# Altium PCB ArduinoMegaSheild.pcbdoc
Units mil, origin at the board's own origin, x right, y up, seen from the top; angles counter-clockwise.
Board outline 4000 x 2100 mil, 2 copper layers (Top Layer, Bottom Layer); 9 components, 60 nets, 114 pads, 0 vias.
Unrouted connection lines stored in the file: 28.
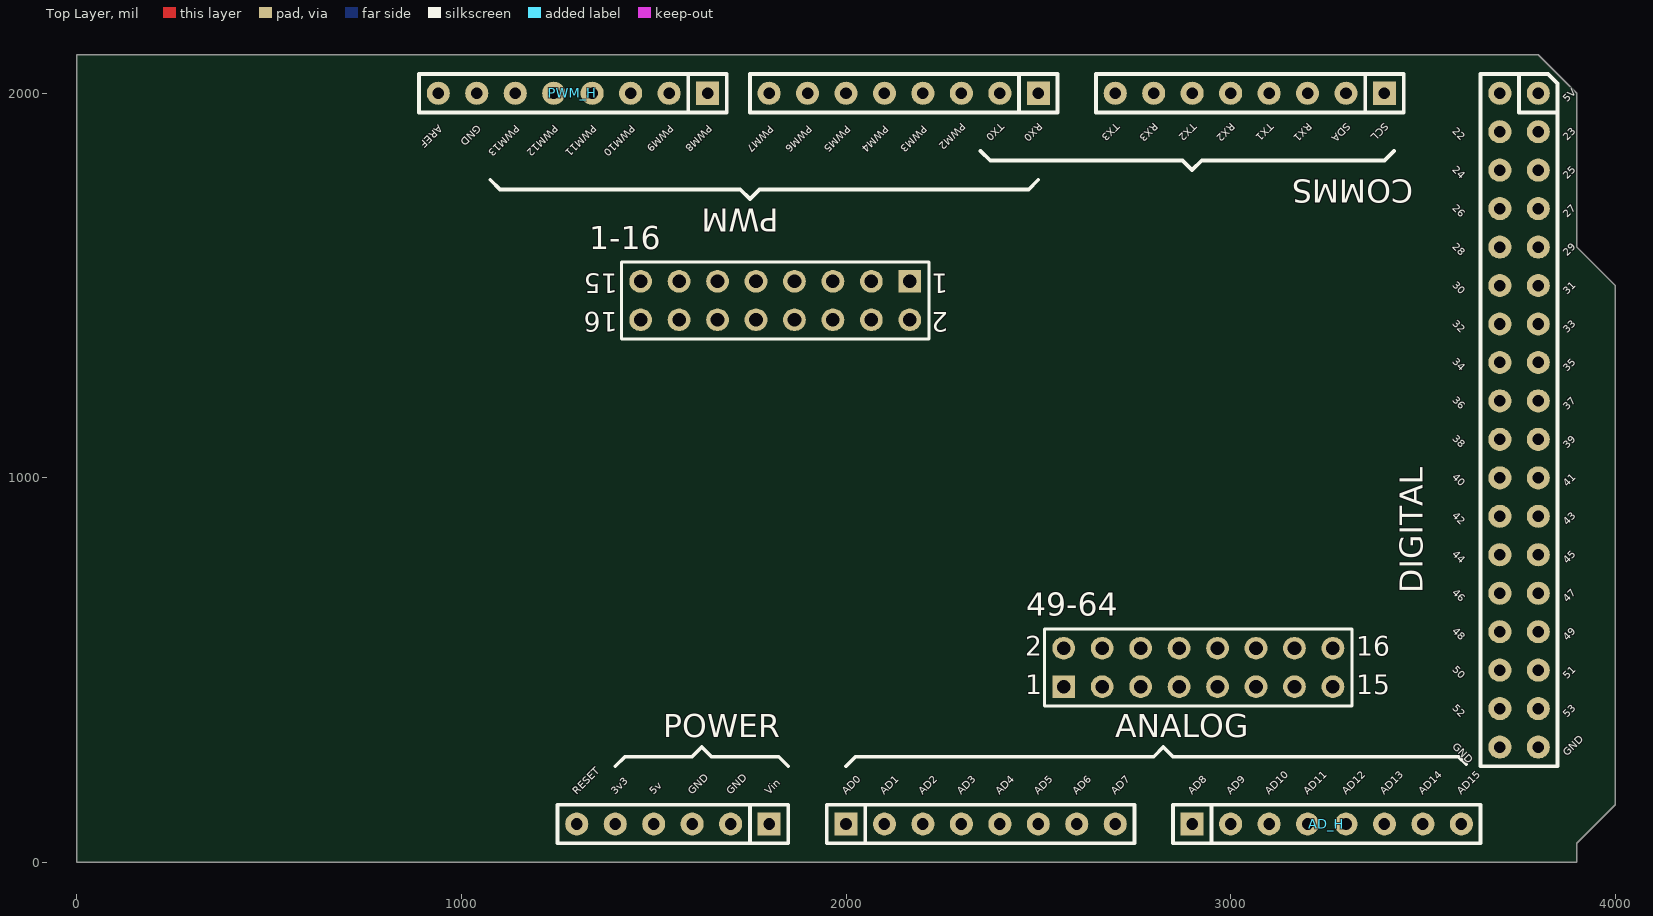
[diagram p0: Top Layer view]
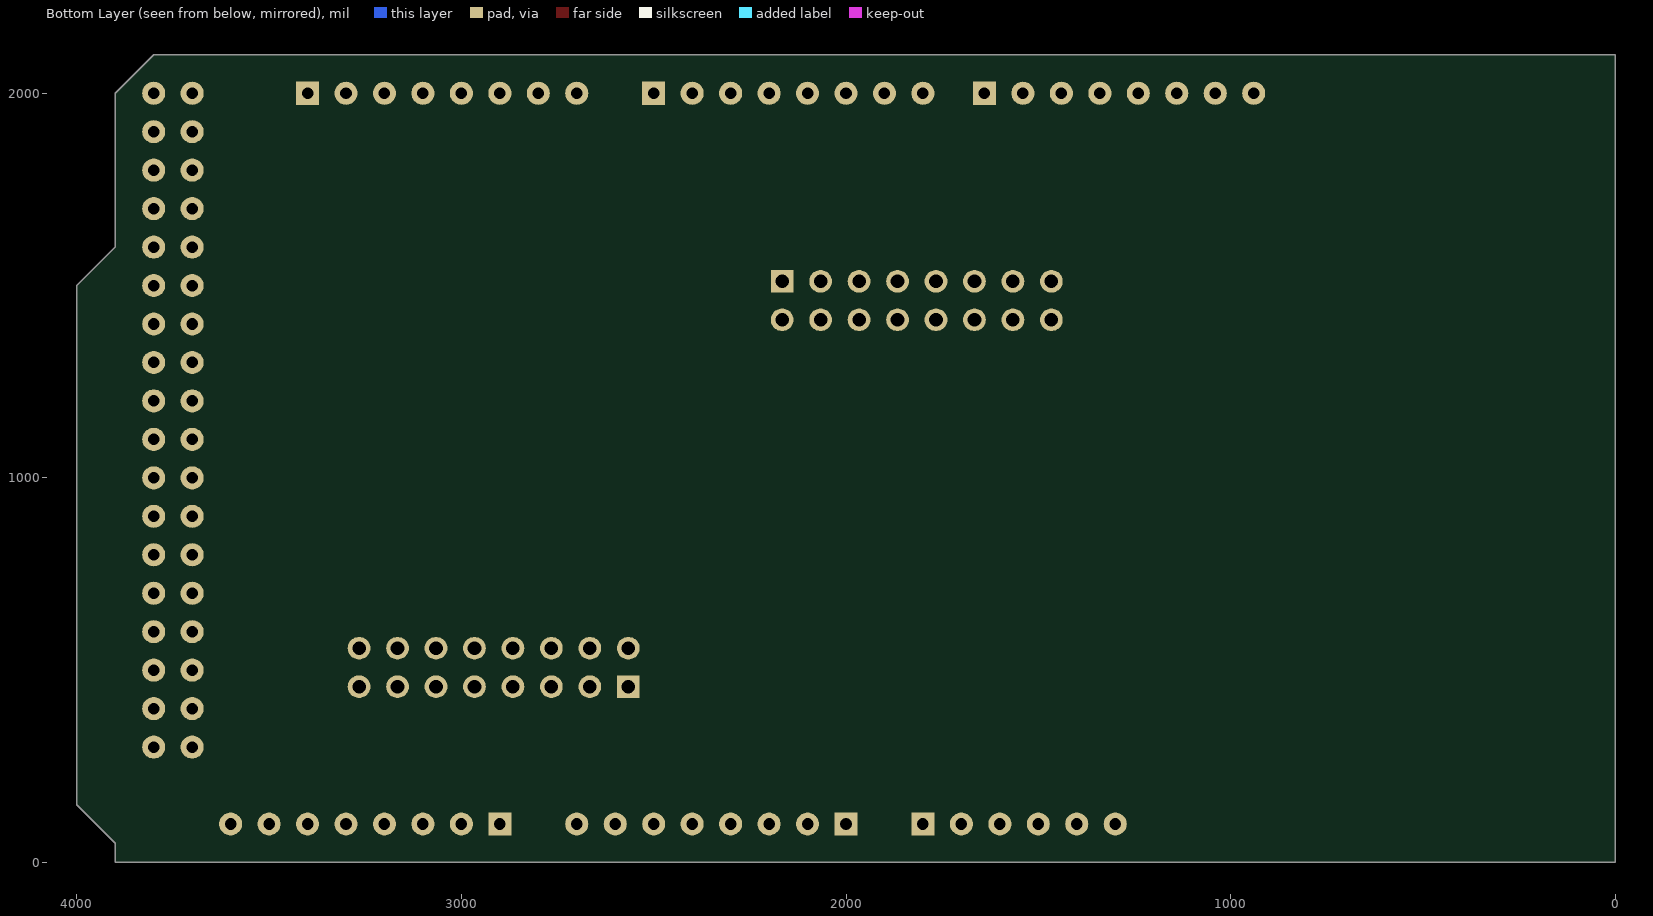
[diagram p1: Bottom Layer view, seen from below]

## Layer stack, top to bottom
Top Solder: solder mask 0.4, Solder Resist, Dk 3.5
Top Layer: signal copper 1.4
Dielectric1: dielectric 12.6, FR-4, Dk 4.8
Bottom Layer: signal copper 1.4
Bottom Solder: solder mask 0.4, Solder Resist, Dk 3.5

## Board outline
0,0 0,2100 3800,2100 3900,2000 3900,1600 4000,1500 4000,150 3900,50 3900,0

## Design rules (kind name [scope] priority, off if disabled: settings)
Clearance [All] p1: gap=10
PolygonConnect [All] p1: connectstyle=Relief reliefconductorwidth=10 reliefentries=4 polygonreliefangle="90 Angle" airgapwidth=10
RoomDefinition AdruinoMegaSheild [InComponentClass('AdruinoMegaSheild')] p1: confinementstyle=ConfineOut formatcopy=TRUE lockcomponents=FALSE outline 4200,900 4750,900 4750,1080 4200,1080
RoutingVias [All] p1: holewidth=28 width=50 viastyle="Through Hole" minholewidth=28 minwidth=50 maxholewidth=28 maxwidth=50
SilkToSolderMaskClearance SilkscreenOverComponentPads [IsPad] p1: minsilkscreentomaskgap=10 clearancetoexposedcopper=TRUE
SolderMaskExpansion [All] p1: expansion=4
Width [All] p1: maxlimit=39.37 minlimit=19.68 preferedwidth=19.68
29 further rules are at their usual default settings.

## Components (designator, comment, footprint, x,y, rotation, side; value= is the part's Value field where it differs from the comment)
1-16 "Header 8X2" HDR2X8 2166,1511 r180 top
49-64 "Header 8X2" HDR2X8 2566,457 r0 top
AD_H "AD_H" "Header 8x1 8.5mm" 2900,100 r0 top locked
ANALOG "AD_L" "Header 8x1 8.5mm" 2000,100 r0 top locked
COMMS "Communication" "Header 8x1 8.5mm" 3400,2000 r180 top
DIGITAL "IO_36" "HEADER 36X 8MM" 3800,2000 r270 top locked
POWER "POWER" "Header 6x1 8.5mm" 1800,100 r180 top locked
PWM "PWM_L" "Header 8x1 8.5mm" 2500,2000 r180 top locked
PWM_H "PWM_H" "Header 8x1 8.5mm" 1640,2000 r180 top locked

## Footprints (in the part's own frame and the unit in brackets; to place one, negate y for a bottom-side part, rotate by r counter-clockwise, add the part's x,y. Pads: shape width x height; smd on the part's side, far side on the other; paste and mask are expansions set on the pad)
HDR2X8 [mm] "Connector; Header; 8x2 Position"
  rect 1.5x1.5 hole 0.9: 1(0,0)
  round 1.5 hole 0.9: 2(0,2.54) 3(2.54,0) 4(2.54,2.54) 5(5.08,0) 6(5.08,2.54) 7(7.62,0) 8(7.62,2.54) 9(10.16,0) 10(10.16,2.54) 11(12.7,0) 12(12.7,2.54) 13(15.24,0) 14(15.24,2.54) 15(17.78,0) 16(17.78,2.54)
  silkscreen extent -1.27,-1.27 19.05,3.81
"Header 6x1 8.5mm" [mil] "Stackable 6 pin header"
  rect 60x60 hole 30: 1(0,0)
  round 60 hole 30: 2(100,0) 3(200,0) 4(300,0) 5(400,0) 6(500,0)
  silkscreen extent -50,-50 550,50, body extent -50,-50 550,50, height 335
"Header 8x1 8.5mm" [mil] "Stackable 8 pin header"
  rect 60x60 hole 30: 1(0,0)
  round 60 hole 30: 2(100,0) 3(200,0) 4(300,0) 5(400,0) 6(500,0) 7(600,0) 8(700,0)
  silkscreen extent -50,-50 750,50, body extent -50,-50 750,50, height 335
"HEADER 36X 8MM" [mil] "Stackable 10 pin header"
  round 60 hole 30: 1(0,0) 2(0,-100) 3(100,0) 4(100,-100) 5(200,0) 6(200,-100) 7(300,0) 8(300,-100) 9(400,0) 10(400,-100) 11(500,0) 12(500,-100) 13(600,0) 14(600,-100) 15(700,0) 16(700,-100) 17(800,0) 18(800,-100) 19(900,-100) 20(900,0) 21(1000,0) 22(1000,-100) 23(1100,0) 24(1100,-100) 25(1200,0) 26(1200,-100) 27(1300,0) 28(1300,-100) 29(1400,0) 30(1400,-100) 31(1500,0) 32(1500,-100) 33(1600,0) 34(1600,-100) 35(1700,0) 36(1700,-100)
  silkscreen extent -50,-150 1750,50, body extent -50,-150 1750,50, height 335

## Part data
1-16 49-64: "Header, 8-Pin, Dual row"

## Nets (pads, with @x,y where several pads share a name; then routed paths per layer and width w, separated by ;. In a path a pad name is that pad's centre, name@x,y a point inside that pad or via, vN(x,y) a via of type N, cw(c..) or ccw(c..) an arc to the next point about the centre after c; other vN are vias at no path point)
AD4: 49-64.1 ANALOG.5
AD5: 49-64.2 ANALOG.6
AD6: 49-64.3 ANALOG.7
AD7: 49-64.4 ANALOG.8
AD8: 49-64.5 AD_H.1
AD9: 49-64.6 AD_H.2
AD10: 49-64.7 AD_H.3
AD11: 49-64.8 AD_H.4
AD12: 49-64.9 AD_H.5
AD13: 49-64.10 AD_H.6
AD14: 49-64.11 AD_H.7
AD15: 49-64.12 AD_H.8
Net17-32_1: DIGITAL.3
Net17-32_2: DIGITAL.4
Net17-32_3: DIGITAL.5
Net17-32_4: DIGITAL.6
Net17-32_5: DIGITAL.7
Net17-32_6: DIGITAL.8
Net17-32_7: DIGITAL.9
Net17-32_8: DIGITAL.10
Net17-32_9: DIGITAL.11
Net17-32_10: DIGITAL.12
Net17-32_11: DIGITAL.13
Net17-32_12: DIGITAL.14
Net17-32_13: DIGITAL.15
Net17-32_14: DIGITAL.16
Net17-32_15: DIGITAL.17
Net17-32_16: DIGITAL.18
Net33-48_1: DIGITAL.34
Net33-48_2: DIGITAL.33
Net33-48_3: DIGITAL.32
Net33-48_4: DIGITAL.31
Net33-48_5: DIGITAL.30
Net33-48_6: DIGITAL.29
Net33-48_7: DIGITAL.28
Net33-48_8: DIGITAL.27
Net33-48_9: DIGITAL.26
Net33-48_10: DIGITAL.25
Net33-48_11: DIGITAL.24
Net33-48_12: DIGITAL.23
Net33-48_13: DIGITAL.22
Net33-48_14: DIGITAL.21
Net33-48_15: DIGITAL.20
Net33-48_16: DIGITAL.19
PWM2: 1-16.1 PWM.3
PWM3: 1-16.2 PWM.4
PWM4: 1-16.3 PWM.5
PWM5: 1-16.4 PWM.6
PWM6: 1-16.5 PWM.7
PWM7: 1-16.6 PWM.8
PWM8: 1-16.7 PWM_H.1
PWM9: 1-16.8 PWM_H.2
PWM10: 1-16.9 PWM_H.3
PWM11: 1-16.10 PWM_H.4
PWM12: 1-16.11 PWM_H.5
PWM13: 1-16.12 PWM_H.6
RX1: 1-16.14 COMMS.3
SCL: 1-16.16 COMMS.1
SDA: 1-16.15 COMMS.2
TX1: 1-16.13 COMMS.4
pads on no net: 49-64.13 49-64.14 49-64.15 49-64.16 ANALOG.1 ANALOG.2 ANALOG.3 ANALOG.4 COMMS.5 COMMS.6 COMMS.7 COMMS.8 DIGITAL.1 DIGITAL.2 DIGITAL.35 DIGITAL.36 POWER.1 POWER.2 POWER.3 POWER.4 POWER.5 POWER.6 PWM.1 PWM.2 PWM_H.7 PWM_H.8

## Silkscreen, mask and mechanical layers (free items; w line width, h text height)
Top Overlay:
  lines w10: 1075,1775 1100,1750 1725,1750 1750,1725 1775,1750 2475,1750 2500,1775 ; 1400,250 1425,275 1600,275 1625,300 1650,275 1825,275 1850,250 ; 2000,250 2025,275 2800,275 2825,300 2850,275 3592.93,275 3612.7,255.23 ; 2350,1850 2375,1825 2875,1825 2900,1800 2925,1825 3400,1825 3425,1850
  text "5V" at 3875,1975 h20 r45
  text "PWM2" at 2300,1925 h20 r225
  text "TX0" at 2400,1925 h20 r225
  text "RX0" at 2500,1925 h20 r225
  text "TX3" at 2700,1925 h20 r225
  text "RX3" at 2800,1925 h20 r225
  text "TX2" at 2900,1925 h20 r225
  text "RX2" at 3000,1925 h20 r225
  text "TX1" at 3100,1925 h20 r225
  text "RX1" at 3200,1925 h20 r225
  text "SDA" at 3300,1925 h20 r225
  text "SCL" at 3400,1925 h20 r225
  text "AREF" at 940,1920 h20 r225
  text "GND" at 1040,1920 h20 r225
  text "PWM13" at 1140,1920 h20 r225
  text "PWM12" at 1240,1920 h20 r225
  text "PWM11" at 1340,1920 h20 r225
  text "PWM10" at 1440,1920 h20 r225
  text "PWM9" at 1540,1920 h20 r225
  text "PWM8" at 1640,1920 h20 r225
  text "PWM7" at 1800,1917.93 h20 r225
  text "PWM6" at 1900,1917.93 h20 r225
  text "PWM5" at 2000,1917.93 h20 r225
  text "PWM4" at 2100,1917.93 h20 r225
  text "PWM3" at 2200,1917.93 h20 r225
  text "22" at 3575,1900 h20 r315
  text "23" at 3875,1875 h20 r45
  text "24" at 3575,1800 h20 r315
  text "25" at 3875,1775 h20 r45
  text "26" at 3575,1700 h20 r315
  text "27" at 3875,1675 h20 r45
  text "28" at 3575,1600 h20 r315
  text "29" at 3875,1575 h20 r45
  text "30" at 3575,1500 h20 r315
  text "31" at 3875,1475 h20 r45
  text "32" at 3575,1400 h20 r315
  text "33" at 3875,1375 h20 r45
  text "34" at 3575,1300 h20 r315
  text "35" at 3875,1275 h20 r45
  text "36" at 3575,1200 h20 r315
  text "37" at 3875,1175 h20 r45
  text "38" at 3575,1100 h20 r315
  text "39" at 3875,1075 h20 r45
  text "40" at 3575,1000 h20 r315
  text "41" at 3875,975 h20 r45
  text "42" at 3575,900 h20 r315
  text "43" at 3875,875 h20 r45
  text "44" at 3575,800 h20 r315
  text "45" at 3875,775 h20 r45
  text "46" at 3575,700 h20 r315
  text "47" at 3875,675 h20 r45
  text "48" at 3575,600 h20 r315
  text "49" at 3875,575 h20 r45
  text "50" at 3575,500 h20 r315
  text "51" at 3875,475 h20 r45
  text "52" at 3575,400 h20 r315
  text "53" at 3875,375 h20 r45
  text "GND" at 3575,300 h20 r315
  text "GND" at 3875,275 h20 r45
  text "RESET" at 1300,175 h20 r45
  text "3v3" at 1400,175 h20 r45
  text "5v" at 1500,175 h20 r45
  text "GND" at 1600,175 h20 r45
  text "GND" at 1700,175 h20 r45
  text "Vin" at 1800,175 h20 r45
  text "AD0" at 2000,175 h20 r45
  text "AD1" at 2100,175 h20 r45
  text "AD2" at 2200,175 h20 r45
  text "AD3" at 2300,175 h20 r45
  text "AD4" at 2400,175 h20 r45
  text "AD5" at 2500,175 h20 r45
  text "AD6" at 2600,175 h20 r45
  text "AD7" at 2700,175 h20 r45
  text "AD8" at 2900,175 h20 r45
  text "AD9" at 3000,175 h20 r45
  text "AD10" at 3100,175 h20 r45
  text "AD11" at 3200,175 h20 r45
  text "AD12" at 3300,175 h20 r45
  text "AD13" at 3400,175 h20 r45
  text "AD14" at 3500,175 h20 r45
  text "AD15" at 3600,175 h20 r45
Mechanical 1:
  the board outline again, w5

## Text inside footprints (layer, text, board x,y; h text height)
1-16: Top Overlay "2" at 2266,1431 h50 r180; Top Overlay "1" at 2266,1531 h50 r180; Top Overlay "15" at 1406,1531 h50 r180; Top Overlay "16" at 1406,1431 h50 r180
49-64: Top Overlay "2" at 2466,537 h50; Top Overlay "1" at 2466,437 h50; Top Overlay "15" at 3326,437 h50; Top Overlay "16" at 3326,537 h50